# EAGLE board design (EAGLE 9.4.2)
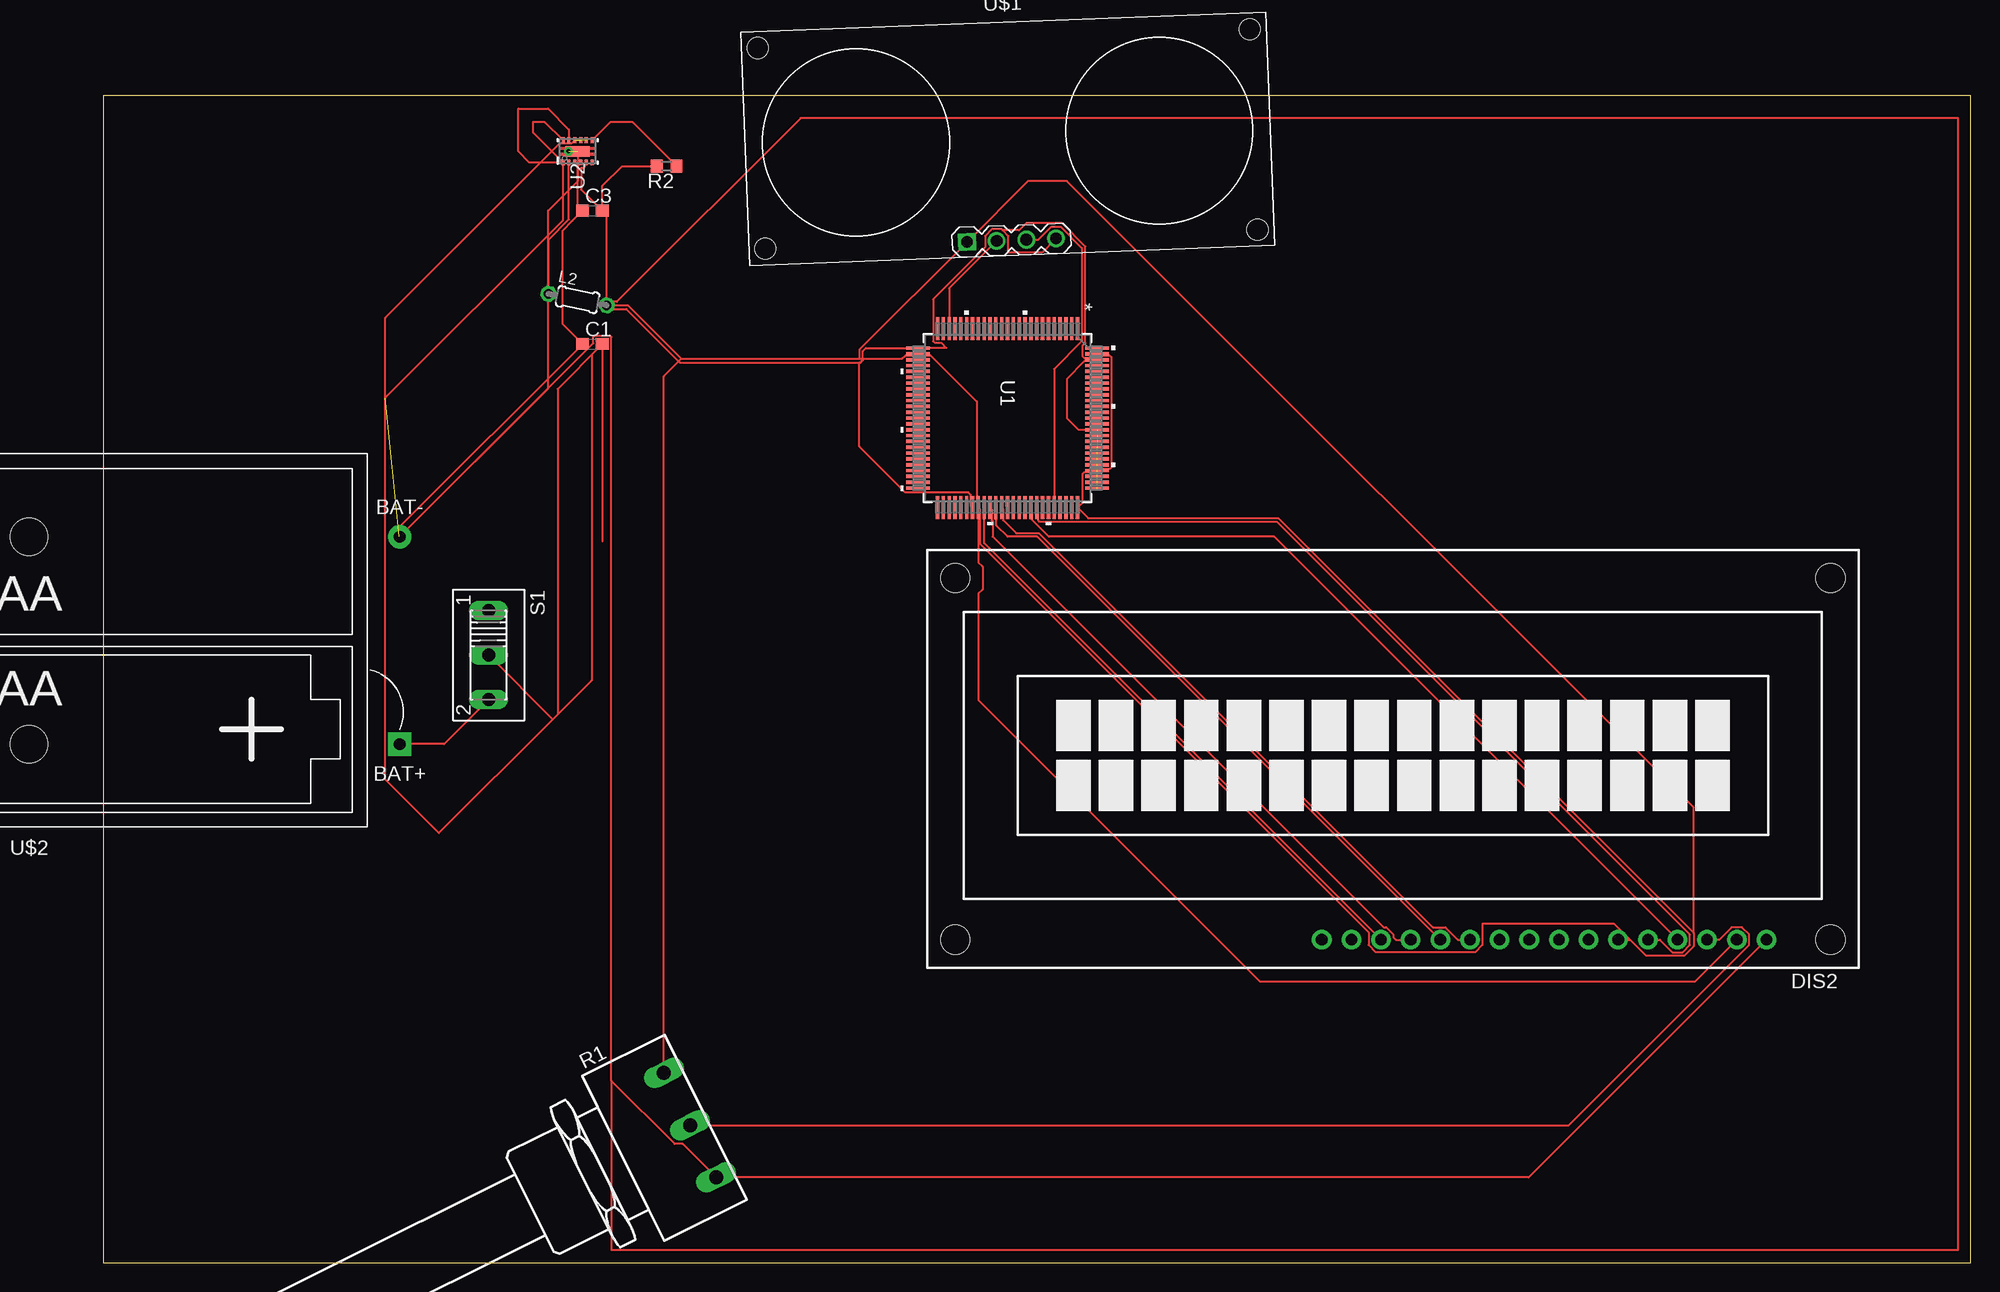
[diagram p0: board, top side]
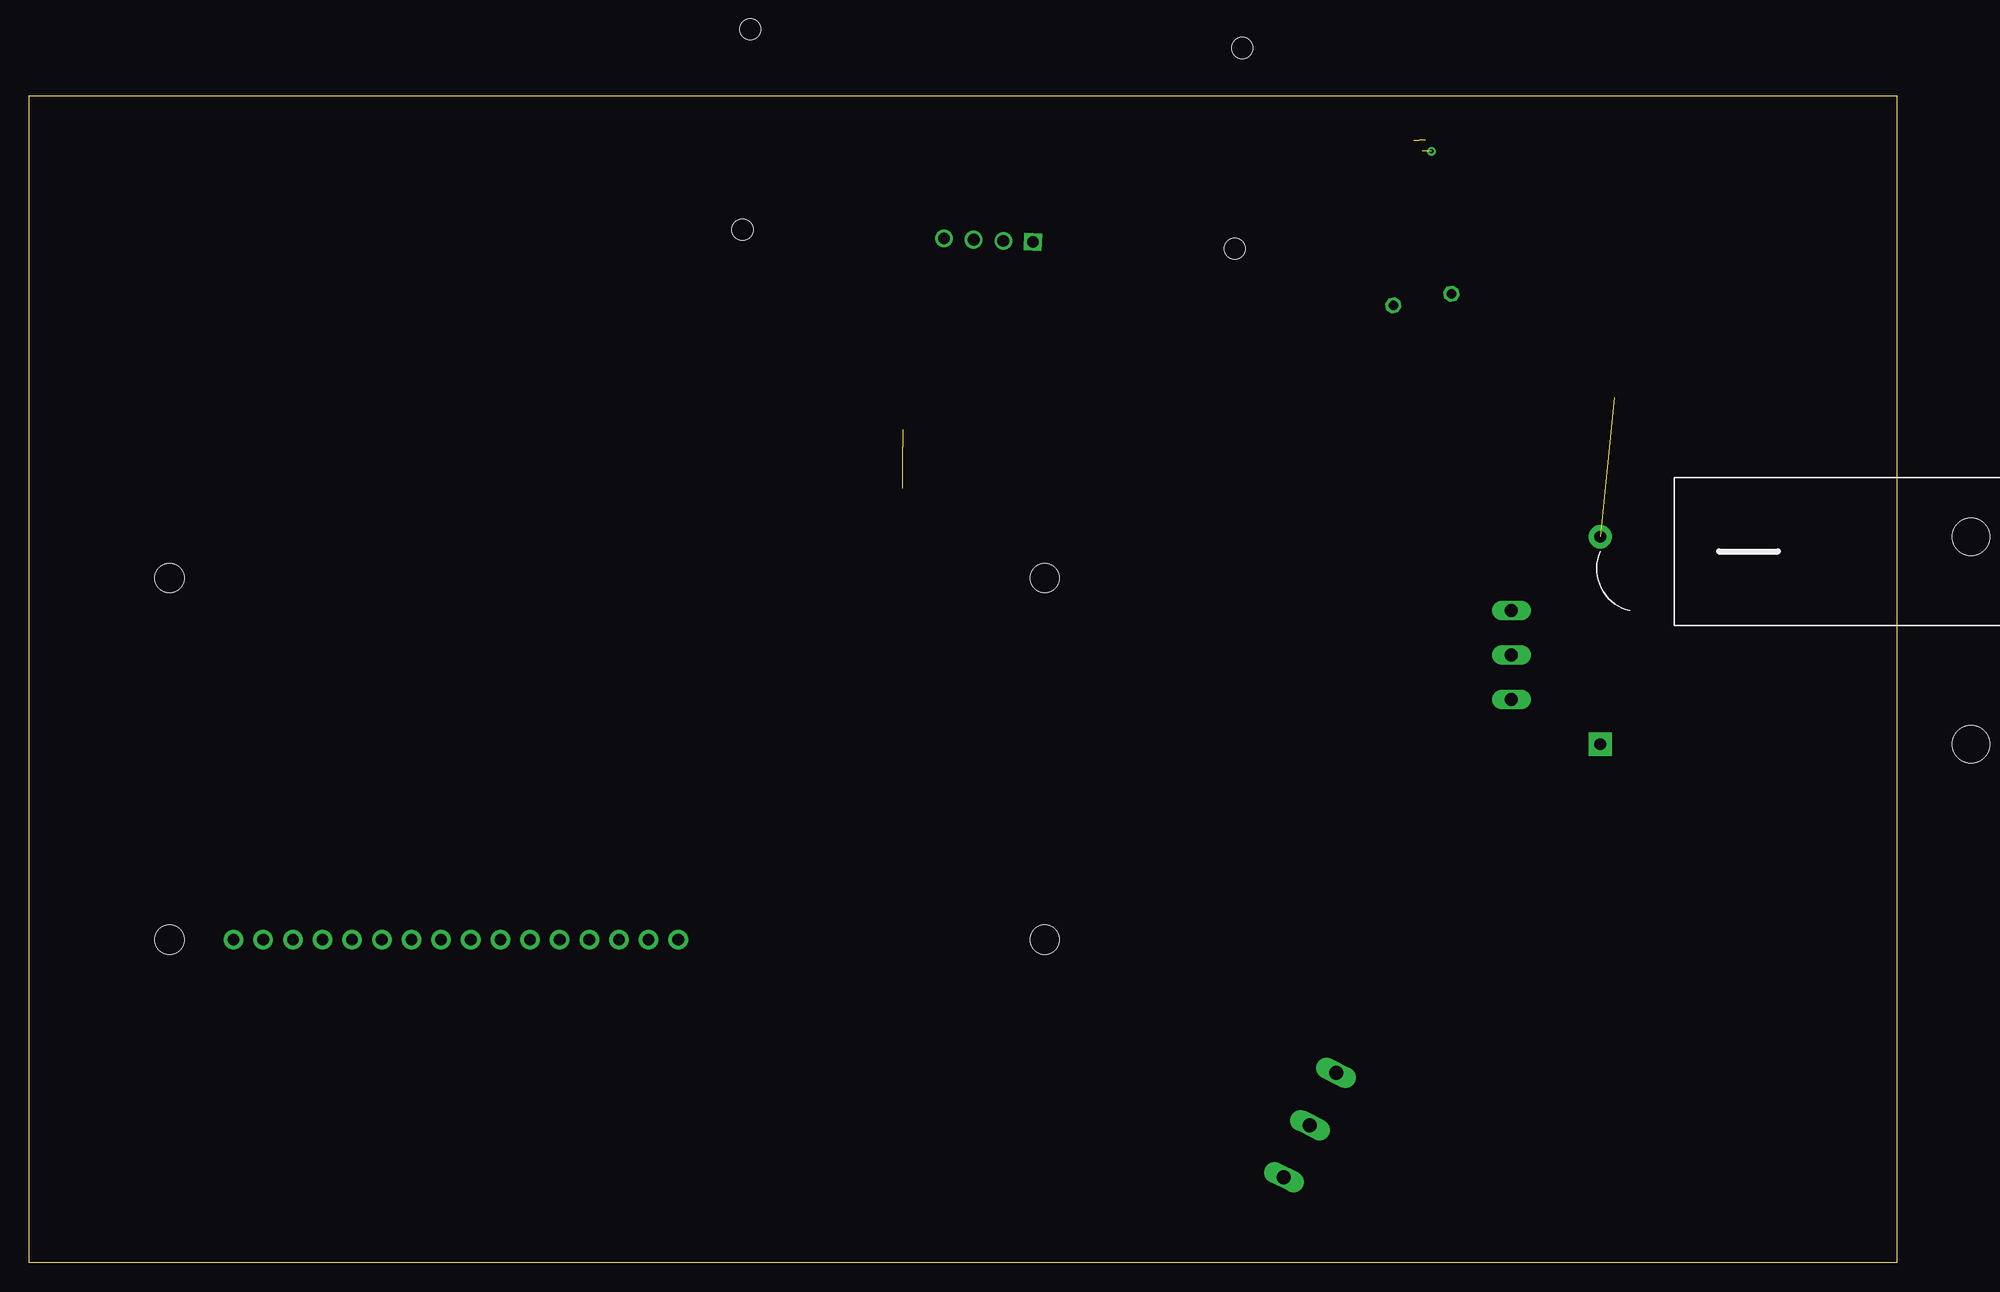
[diagram p1: board, bottom side, seen from below]

Size 160 x 100 mm. Coordinates in mm from the lower left corner, seen from the top.
Outline: 0,0 160,0 160,100 0,100 0,0
Copper layers (1*16): Top 0.035mm / dielectric 1.5mm / Bottom 0.035mm
Design rules "default": minimum track width 6mil, minimum drill 0.35mm, track to track 6mil, track to pad 6mil, pad to pad 6mil, via to via 6mil, smd to smd 6mil, copper to edge 40mil, drill to drill 6mil, minimum pad ring 10mil, minimum via ring 8mil, stop-mask expansion 4mil, vias tented up to drill 0mil, thermal gap 10mil

## Footprints (pad centres in the part's own frame; a part is rotated, then mirrored left to right if it is on the bottom)
C0603 = smd 1.1 x 1: 1 -0.85,0; 2 0.85,0
TUXGR_16X2_R2 = drill 1 pad 1.676: 1 -32,15.5; 2 -29.46,15.5; 3 -26.92,15.5; 4 -24.38,15.5; 5 -21.84,15.5; 6 -19.3,15.5; 7 -16.76,15.5; 8 -14.22,15.5; 9 -11.68,15.5; 10 -9.14,15.5; 11 -6.6,15.5; 12 -4.06,15.5; 13 -1.52,15.5; 14 1.02,15.5; 15 3.56,15.5; 16 6.1,15.5 | hole 2.5: -37.5,-15.5; 37.5,-15.5; -37.5,15.5; 37.5,15.5
0204/5 = drill 0.813 octagon: 1 -2.54,0; 2 2.54,0
PC16S = drill 1.2 long: 1A -5,6.5; 1E 5,6.5; 1S 0,6.5
R0603 = smd 1 x 1.1: 1 -0.85,0; 2 0.85,0
255SB = drill 1.118 long: 1 -3.81,0; 2 0,0; 3 3.81,0
PZ100-M = smd 1.981 x 0.279: 1 -7.671,6; 2 -7.671,5.5; 3 -7.671,5; 4 -7.671,4.5; 5 -7.671,4; 6 -7.671,3.5; 7 -7.671,3; 8 -7.671,2.5; 9 -7.671,2; 10 -7.671,1.5; 11 -7.671,1; 12 -7.671,0.5; 13 -7.671,0; 14 -7.671,-0.5; 15 -7.671,-1; 16 -7.671,-1.5; 17 -7.671,-2; 18 -7.671,-2.5; 19 -7.671,-3; 20 -7.671,-3.5; 21 -7.671,-4; 22 -7.671,-4.5; 23 -7.671,-5; 24 -7.671,-5.5; 25 -7.671,-6; 51 7.671,-6; 52 7.671,-5.5; 53 7.671,-5; 54 7.671,-4.5; 55 7.671,-4; 56 7.671,-3.5; 57 7.671,-3; 58 7.671,-2.5; 59 7.671,-2; 60 7.671,-1.5; 61 7.671,-1; 62 7.671,-0.5; 63 7.671,0; 64 7.671,0.5; 65 7.671,1; 66 7.671,1.5; 67 7.671,2; 68 7.671,2.5; 69 7.671,3; 70 7.671,3.5; 71 7.671,4; 72 7.671,4.5; 73 7.671,5; 74 7.671,5.5; 75 7.671,6 | smd 0.279 x 1.981: 26 -6,-7.671; 27 -5.5,-7.671; 28 -5,-7.671; 29 -4.5,-7.671; 30 -4,-7.671; 31 -3.5,-7.671; 32 -3,-7.671; 33 -2.5,-7.671; 34 -2,-7.671; 35 -1.5,-7.671; 36 -1,-7.671; 37 -0.5,-7.671; 38 0,-7.671; 39 0.5,-7.671; 40 1,-7.671; 41 1.5,-7.671; 42 2,-7.671; 43 2.5,-7.671; 44 3,-7.671; 45 3.5,-7.671; 46 4,-7.671; 47 4.5,-7.671; 48 5,-7.671; 49 5.5,-7.671; 50 6,-7.671; 76 6,7.671; 77 5.5,7.671; 78 5,7.671; 79 4.5,7.671; 80 4,7.671; 81 3.5,7.671; 82 3,7.671; 83 2.5,7.671; 84 2,7.671; 85 1.5,7.671; 86 1,7.671; 87 0.5,7.671; 88 0,7.671; 89 -0.5,7.671; 90 -1,7.671; 91 -1.5,7.671; 92 -2,7.671; 93 -2.5,7.671; 94 -3,7.671; 95 -3.5,7.671; 96 -4,7.671; 97 -4.5,7.671; 98 -5,7.671; 99 -5.5,7.671; 100 -6,7.671
DSS0012A = smd 0.5 x 0.25: 1 -0.95,1.25; 2 -0.95,0.75; 3 -0.95,0.25; 4 -0.95,-0.25; 5 -0.95,-0.75; 6 -0.95,-1.25; 7 0.95,-1.25; 8 0.95,-0.75; 9 0.95,-0.25; 10 0.95,0.25; 11 0.95,0.75; 12 0.95,1.25 | smd 0.9 x 2: 13 0,0 | smd 0.5 x 0.5: V 0,0
ULTRASONIC-HC-SR04 = drill 1 square: 1 -3.81,-8.89 | drill 1: 2 -1.27,-8.89; 3 1.27,-8.89; 4 3.81,-8.89 | hole 1.8: -21.1,8.4; -21.1,-8.8; 21.1,-8.8; 21.1,8.4
BATTERY-HOLDER-2AA = drill 1 pad 2 square: BAT+ -31.75,8.89 | drill 1 pad 2: BAT- -31.75,-8.89 | hole 3.2: 0,8.89; 0,-8.89

## Placement (x,y rotation side)
C1  2uf  [C0603]  41.91,78.74 0 top
C3  2uf  [C0603]  41.91,90.17 0 top
DIS2  TUXGR_16X2_R2  [TUXGR_16X2_R2]  110.49,43.18 180 top
L2  [0204/5]  40.64,82.55 348.7 top
R1  PC16S  [PC16S]  44.45,8.89 296.5 top
R2  1k  [R0603]  48.26,93.98 180 top
S1  [255SB]  33.02,52.07 270 top
U1  MSP430FR6989IPZPZ100-M  [PZ100-M]  77.47,72.39 270 top
U2  TPS62745DSSR  [DSS0012A]  40.64,95.25 90 top
U$1  ULTRASONIC-HC-SR04  [ULTRASONIC-HC-SR04]  77.47,96.52 2.2 top
U$2  BATTERY-HOLDER-2AA  [BATTERY-HOLDER-2AA]  -6.35,53.34 180 top

## Library data of the parts
C1 C3 = rcl; SPICEPREFIX: C
DIS2 = display-lcd; OC_FARNELL: unknown; OC_NEWARK: unknown
L2 = rcl; SPICEPREFIX: L
R1 = piher; OC_FARNELL: 4452940; OC_NEWARK: unknown
R2 = rcl; SPICEPREFIX: R
S1 = switch
U1 = msp; MANUFACTURER_PART_NUMBER: MSP430FR6989IPZ; VENDOR: Texas Instruments
U2 = untitled
U$1 U$2 = diy-modules

## Nets
0: U2.4
N$1: C1.2 S1.2 U2.1 U2.8 U2.9 U2.10 U2.11 U2.12
N$2: C3.2 DIS2.2 DIS2.6 L2.2 R1.1A R2.2 U1.27 U1.58 U1.75 U1.79 U1.99 U2.5 U$1.1
N$3: R2.1 U2.7
N$4: S1.3 U$2.BAT+
N$5: DIS2.14 U1.59
N$6: L2.1 U2.2
N$7: U1.71 U$1.3
N$8: U1.23 U$1.2
N$9: DIS2.13 U1.60
N$10: DIS2.12 U1.61
N$11: DIS2.11 U1.62
N$12: C1.1 C3.1 DIS2.1 R1.1E U1.26 U1.57 U1.76 U1.80 U1.83 U1.86 U1.98 U2.3 U2.13 U$1.4 U$2.BAT-
N$13: DIS2.4 U1.67
N$14: DIS2.5 U1.68
N$16: DIS2.3 R1.1S
VIN_SW: U2.6

## Tracks (layer width: path | path; a pad name or v marks a point on that pad's centre or on a via)
N$1  (3 unrouted)
  Top 0.152: U2.1 36.83,96.86 36.83,97.79 37.8,97.79 U2.12 | U2.1 36.51,94.3 35.56,95.25 35.56,98.91 38.1,98.91 39.89,97.12 U2.11 | C1.2 42.76,61.81 | U2.1 39.39,89.35 24.17,74.13 | 38.91,46.98 41.84,49.9 41.84,77.82 C1.2 | 38.91,46.98 38.51,46.58 | 38.51,46.58 28.75,36.82 24.17,41.4 24.17,74.13 | U2.10 40.13,95.94 39.12,95.94 24.17,81 24.17,74.13 | C1.2 38.91,74.89 38.91,46.98 | 25.36,62.23 25.4,62.23 | S1.2 38.51,46.58
N$2
  Top 0.152: U2.5 41.24,94.15 41.24,93.95 41.11,93.82 40.95,93.82 40.95,91.98 C3.2 | C3.2 42.76,92.29 44.45,93.98 R2.2 | C3.2 43.13,89.8 L2.2 44.95,82.05 49.53,77.47 | 69.67,77.76 68.71,77.76 68.43,77.47 64.77,77.47 | U1.27 69.67,77.76 | 49.53,77.47 64.77,77.47 | R1.1A 48.04,75.98 49.53,77.47 | 136.24,28.25 136.24,39.02 82.55,92.71 79.22,92.71 U$1.1 64.77,78.26 64.77,77.47 | DIS2.6 130.82,27.68 | 130.82,27.68 132.19,26.31 135.44,26.31 136.24,27.11 136.24,28.25 | 69.67,77.76 70.88,77.76 74.84,73.8 74.84,64.85 U1.58 | 136.24,28.25 100.69,63.8 84.38,63.8 U1.75 83.92,65.17 83.92,67.62 84.06,67.76 85.01,67.76 U1.79 85.27,68.02 86.23,68.02 86.36,68.16 86.36,77.62 86.23,77.76 85.27,77.76 U1.99 | 130.82,27.68 129.45,29.05 118.16,29.05 118.16,27.24 117.53,26.61 109.03,26.61 108.4,27.24 108.4,28.32 75.1,61.62 75.1,64.59 U1.58 | U1.58 74.97,60.01 75.33,59.65 75.33,57.71 74.97,57.35 74.97,48.22 99.06,24.13 136.4,24.13 DIS2.2
N$3
  Top 0.152: U2.7 43.48,97.79 45.3,97.79 R2.1
N$4
  Top 0.152: S1.3 29.21,44.45 U$2.BAT+
N$5
  Top 0.152: DIS2.14 75.47,61.68 U1.59
N$6
  Top 0.152: L2.1 38.15,87.68 39.89,89.42 U2.2
N$7
  Top 0.152: U1.71 81.47,76.61 83.84,78.98 83.84,86.97 82.03,88.78 81.2,88.78 80.11,87.69 U$1.3
N$8
  Top 0.152: U$1.2 72.47,83.52 U1.23
N$9
  Top 0.152: U1.60 76.1,64.59 76.1,63.63 76.2,63.54 76.2,62.23 109.68,28.75 109.91,28.75 110.54,28.12 110.54,27.89 110.75,27.68 DIS2.13
N$10
  Top 0.152: DIS2.12 80,62.23 77.47,62.23 76.5,63.2 76.5,63.66 76.47,63.7 U1.61
N$11
  Top 0.152: U1.62 77.1,64.59 77.1,63.63 78.2,62.53 80.13,62.53 113.91,28.75 114.99,28.75 116.06,27.68 DIS2.11
N$12  (via drill 0.35)  (4 unrouted)
  Top 0.152: U2.3 40.39,94.1 40.64,93.85 40.64,90.59 C3.1 40.2,89.31 40.2,89.29 39.37,88.47 39.37,80.43 C1.1 | C1.1 40.64,79.16 | C1.1 25.4,63.08 U$2.BAT- | DIS2.1 122.13,7.32 R1.1E 49.64,10.17 48.96,10.17 43.54,15.59 | U$2.BAT- 41.98,78.81 41.98,79.33 42.12,79.47 43.41,79.47 43.54,79.33 43.54,15.59 | 77.06,88.48 77.54,88 77.54,86.59 80.43,86.59 U$1.4 | 77.06,88.48 76.95,88.58 76.13,88.58 75.55,88 75.55,87.02 71.1,82.58 71.1,78.98 71.24,78.84 71.77,78.84 72.23,78.39 U1.26 65.33,78.39 65.08,78.13 65.08,77.34 64.9,77.17 64.77,77.17 | 64.77,77.17 49.4,77.17 44.82,81.75 43.01,81.75 42.83,81.93 42.83,82.18 43.01,82.36 44,82.36 59.73,98.09 158.91,98.09 158.91,1.09 43.54,1.09 43.54,15.59 | U$2.BAT- 38.1,74.93 38.1,90.17 40.64,92.71 U2.13 | U1.86 83.55,71.39 82.55,72.39 82.55,75.75 84.06,77.26 85.01,77.26 U1.98 85.01,77.52 84.06,77.52 83.92,77.66 83.92,78.62 84.14,78.85 84.14,87.1 82.16,89.08 79.07,89.08 78.47,88.48 77.06,88.48 | U1.57 74.34,64.85 74.34,65.8 74.12,66.02 68.71,66.02 64.77,69.97 64.77,77.17
  other vias: 39.86,95.25
N$13
  Top 0.152: DIS2.4 100.32,62.23 81.01,62.23 79.47,63.77 U1.67
N$14
  Top 0.152: U1.68 80.1,64.59 80.1,63.63 80.24,63.5 100.56,63.5 135.94,28.12 135.94,27.24 135.31,26.61 134.43,26.61 133.36,27.68 DIS2.5
N$16
  Top 0.152: DIS2.3 138.44,27.68 139.51,28.75 140.39,28.75 141.02,28.12 141.02,27.24 125.57,11.79 R1.1S